# Altium PCB BloodPressure.PcbDoc
Units mil, origin at the board's own origin, x right, y up, seen from the top; angles counter-clockwise.
Board outline 3065 x 3285 mil, 2 copper layers (Top Layer, Bottom Layer); 38 components, 29 nets, 143 pads, 12 vias.
Unrouted connection lines stored in the file: 1.
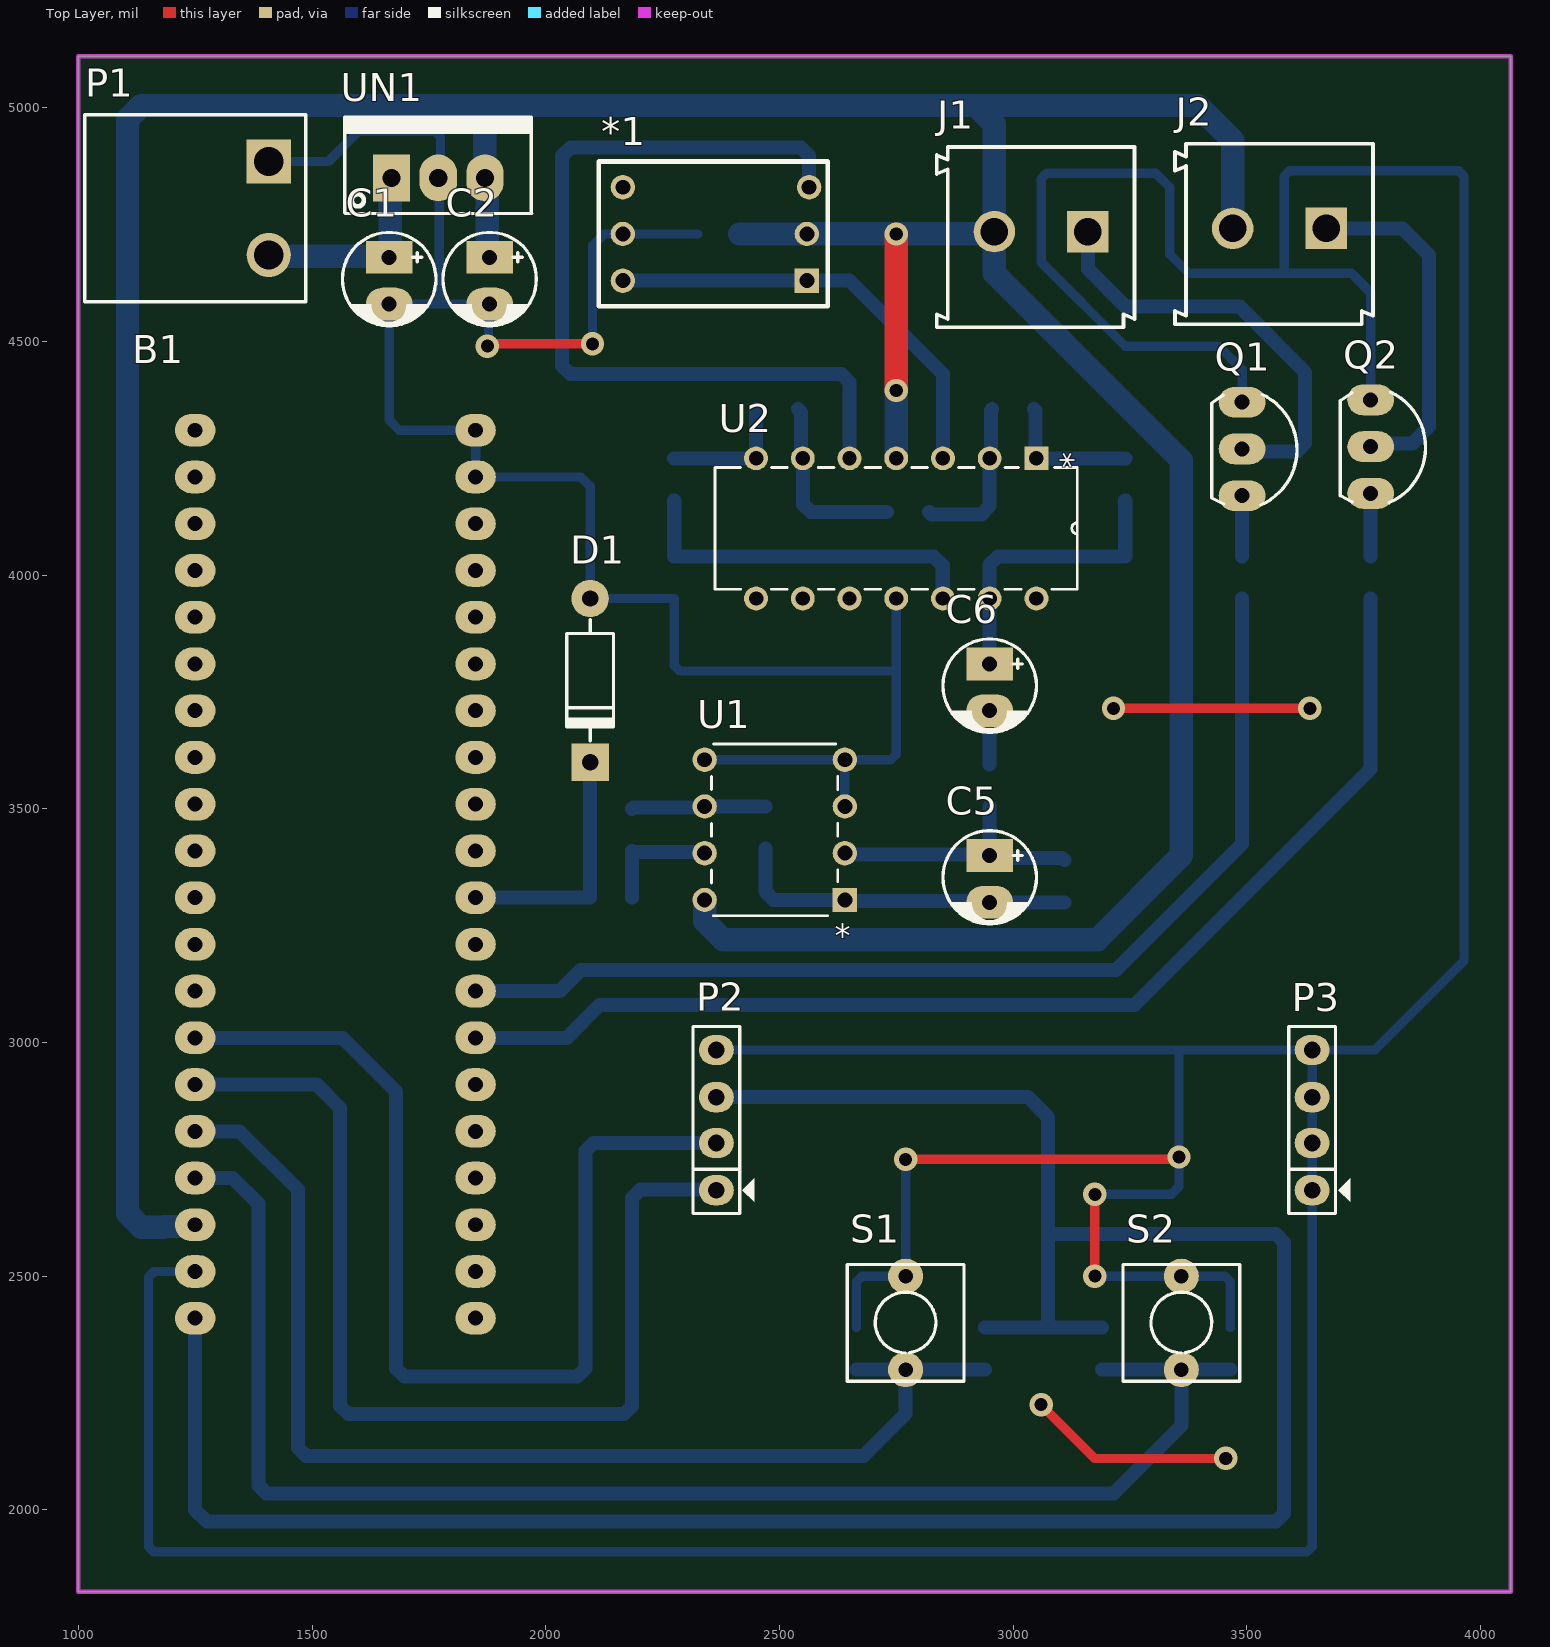
[diagram p0: Top Layer view]
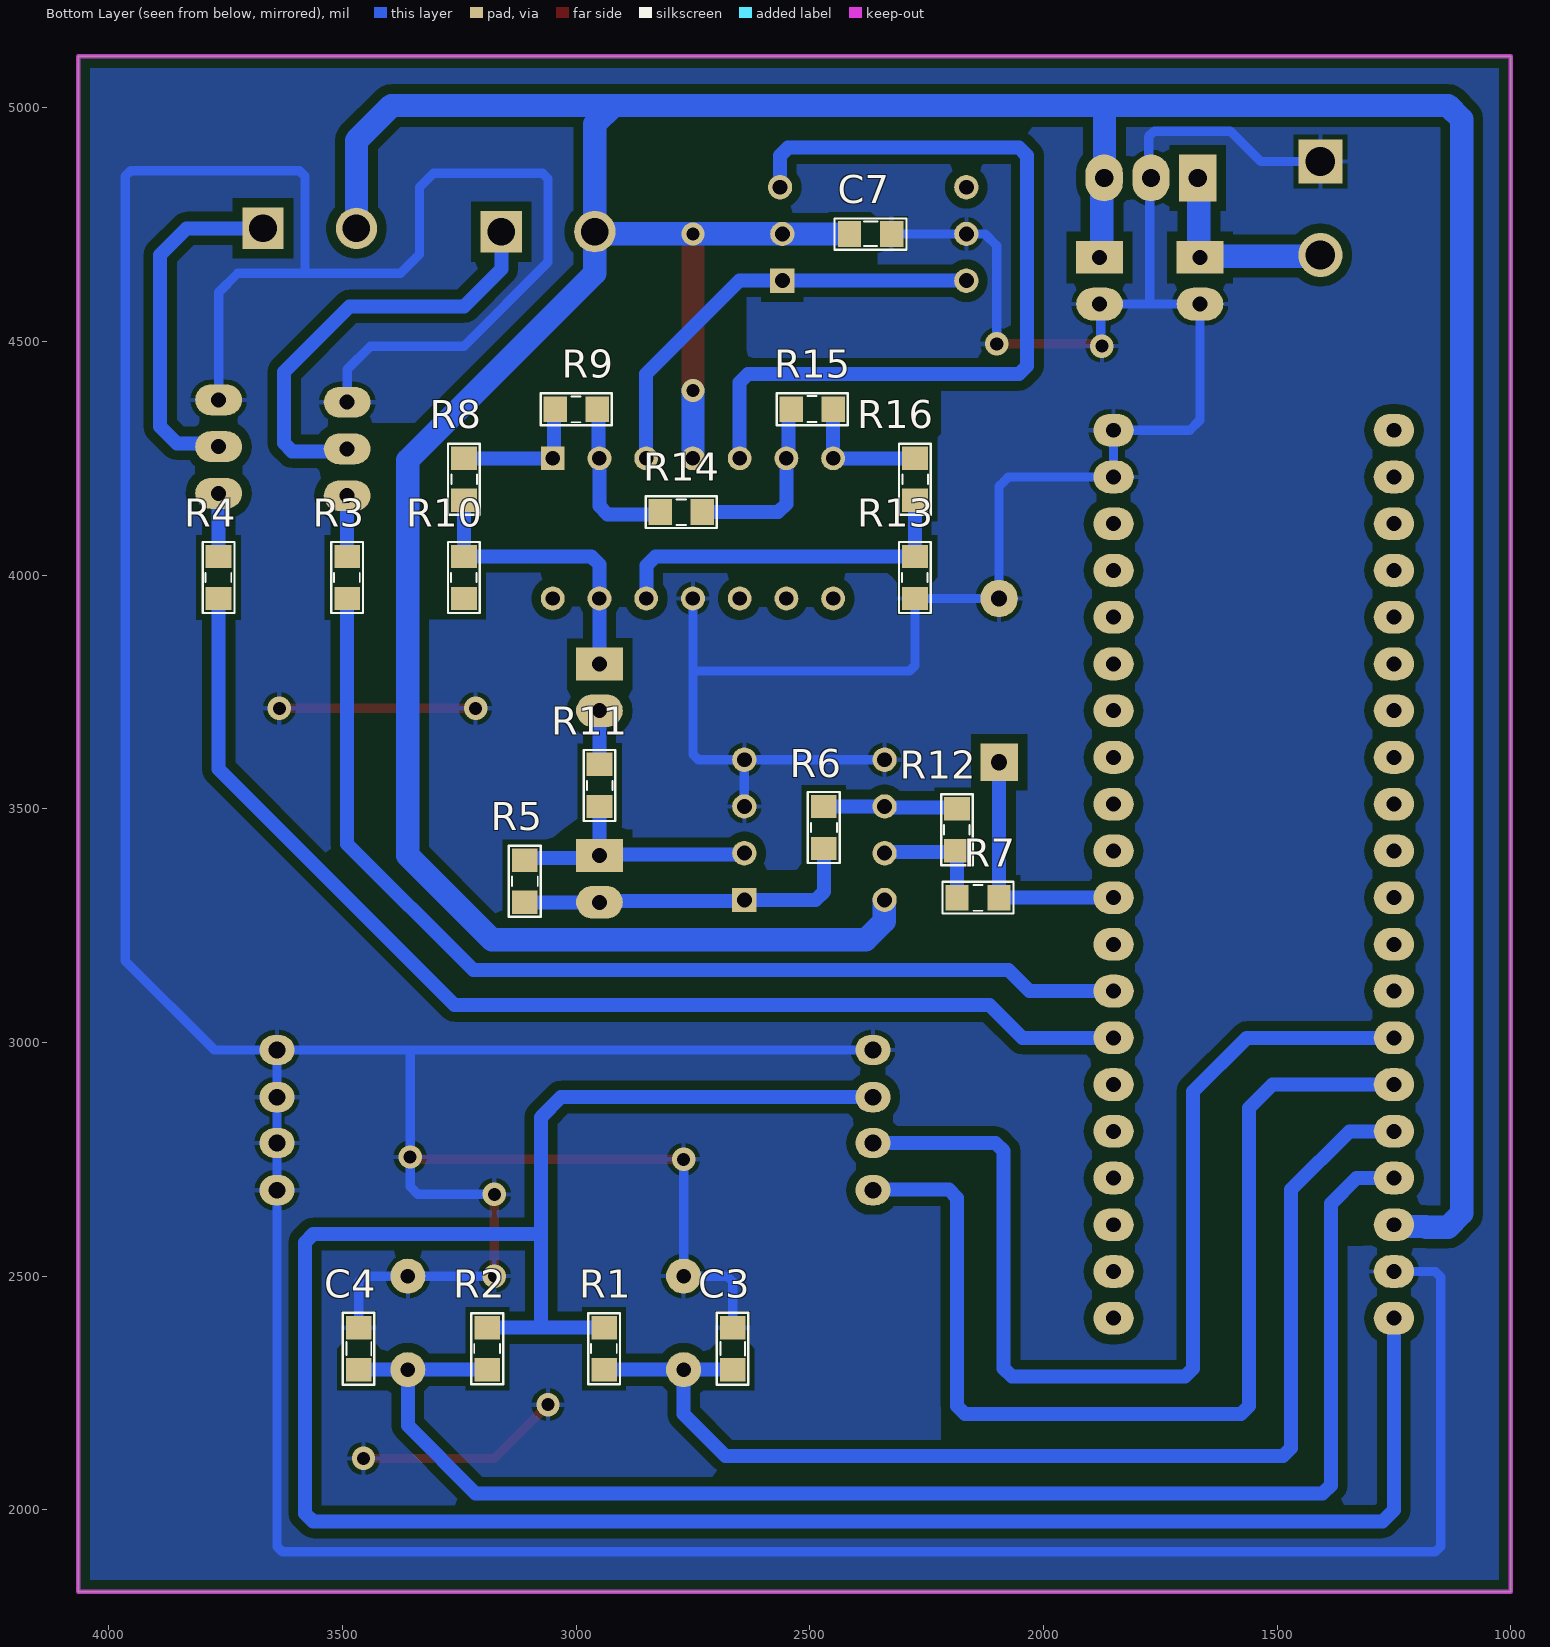
[diagram p1: Bottom Layer view, seen from below]
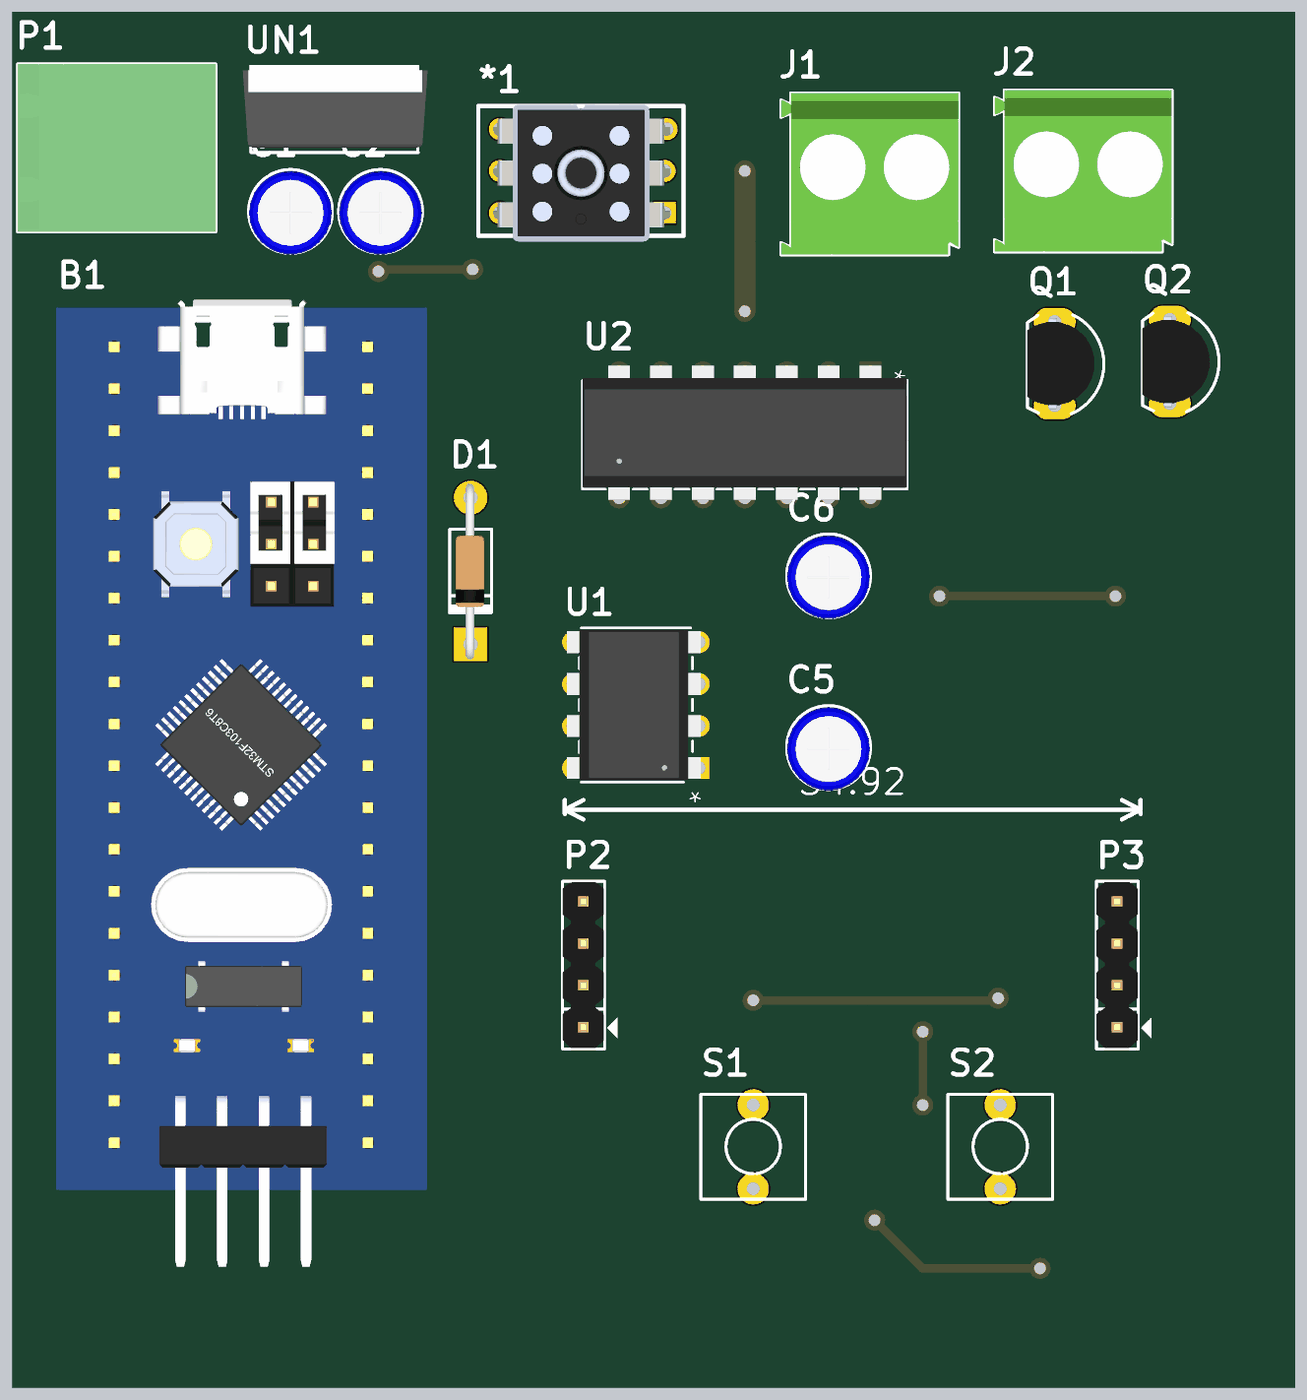
[diagram p2: 3D render of the assembled board from above, using the file's embedded part models]
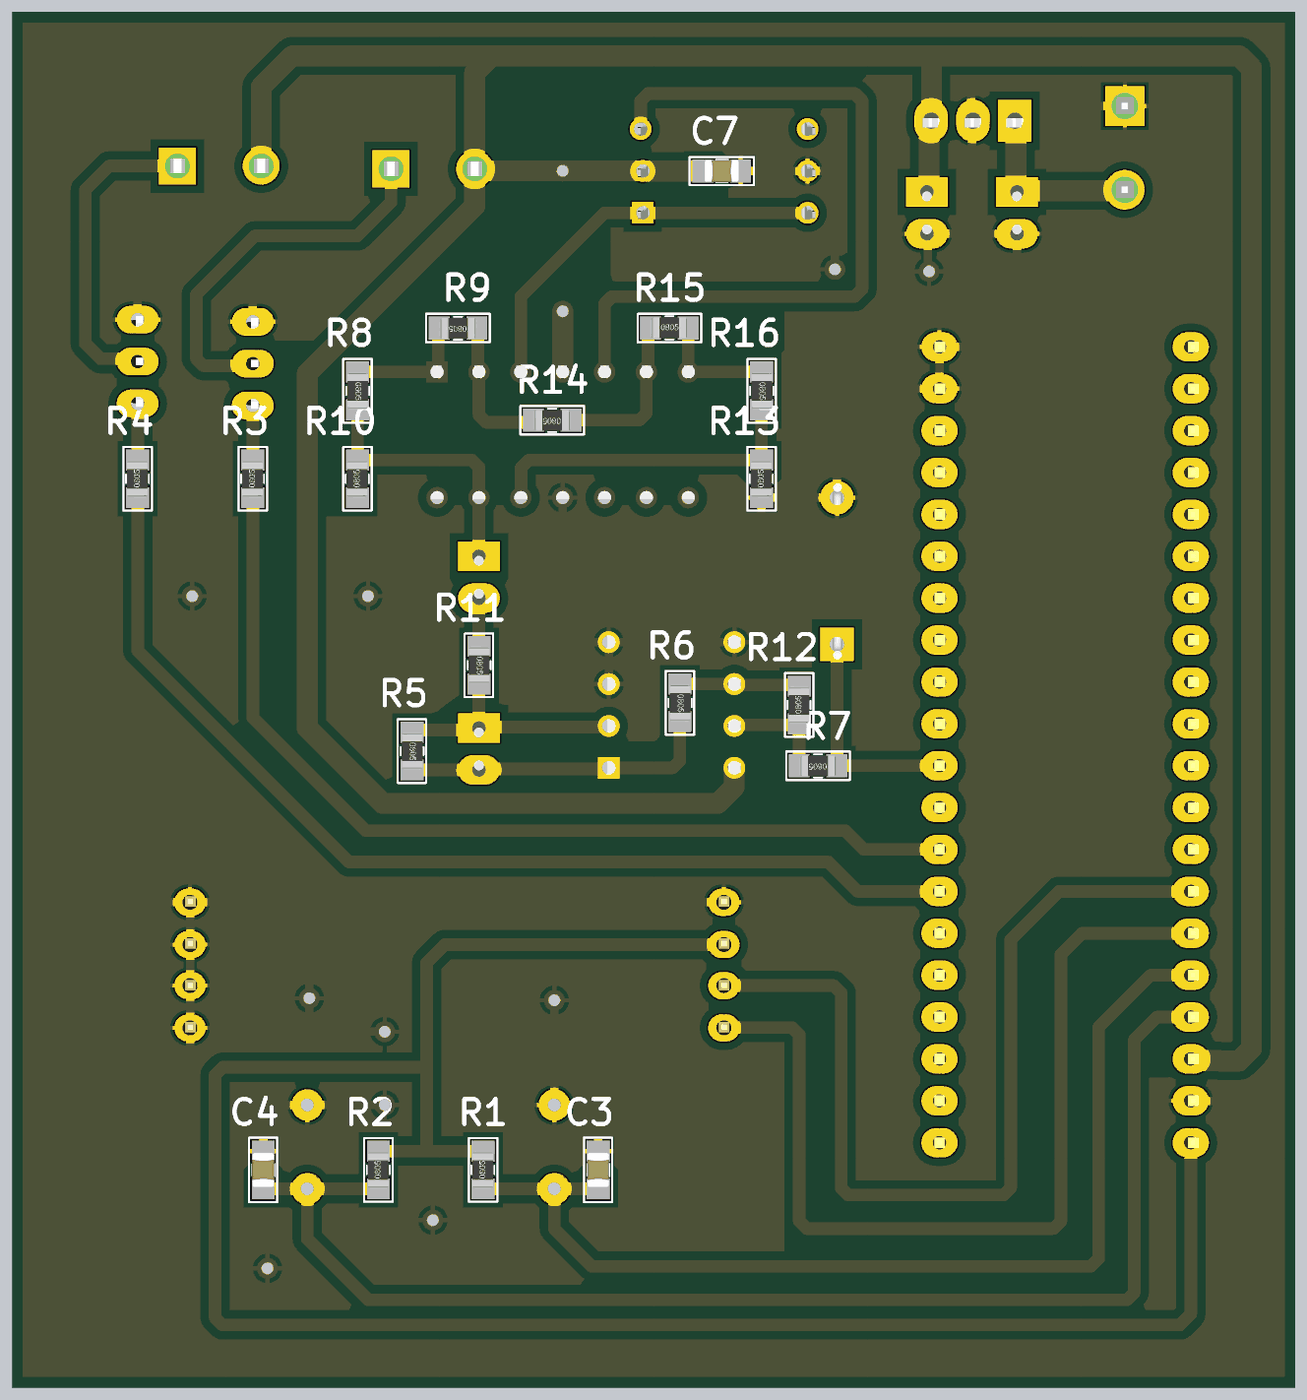
[diagram p3: 3D render of the assembled board from below, using the file's embedded part models]

## Layer stack, top to bottom
Top Solder: solder mask 0.4, Solder Resist, Dk 3.5
Top Layer: signal copper 1.4
Dielectric 1: dielectric 12.6, FR-4, Dk 4.8
Bottom Layer: signal copper 1.4
Bottom Solder: solder mask 0.4, Solder Resist, Dk 3.5

## Board outline
1000,1825 1000,5110 4065,5110 4065,1825

## Design rules (kind name [scope] priority, off if disabled: settings)
Clearance [All] p1: gap=20 ignorepadtopadclearanceinfootprint=FALSE
PolygonConnect [All] p1: connectstyle=Relief reliefconductorwidth=10 reliefentries=4 polygonreliefangle="90 Angle" airgapwidth=10
RoutingVias [All] p1: holewidth=28 width=50 viastyle="Through Hole" minholewidth=28 minwidth=50 maxholewidth=28 maxwidth=50
SolderMaskExpansion [All] p1: expansion=4 istentingtop=FALSE
Width [All] p1: maxlimit=50 minlimit=20 preferedwidth=30 minimp=50.000000 maximp=50.000000 favimp=50.000000
30 further rules are at their usual default settings.

## Components (designator, comment, footprint, x,y, rotation, side; value= is the part's Value field where it differs from the comment)
*1 "MPS20N0040D" MPS20N0040D 2558.7,4630 r180 top
B1 "BluePill" BlUEPILL 1850,4310 r180 top
C1 "Cap Pol" CP1/2 1665,4680 r270 top value=10uF
C2 "Cap Pol" CP1/2 1880,4680 r270 top value=10uF
C3 "Cap-100nF-50V-0805" CAP-SM-0805 2665,2390 r270 bottom value=100nF/50V
C4 "Cap-100nF-50V-0805" CAP-SM-0805 3465,2390 r270 bottom value=100nF/50V
C5 "Cap Pol" CP1/2 2950,3400 r270 top value=24nF
C6 "Cap Pol" CP1/2 2950,3810 r270 top value=47uF
C7 "Cap-100nF-50V-0805" CAP-SM-0805 2415,4730 r180 bottom value=10nF/50V
D1 "Diode" D1A 2095,3950 r90 top
J1 "691216510002S" 691216510002S 3060,4723.19 r180 top
J2 "691216510002S" 691216510002S 3570,4730 r180 top
P1 "691312510002" 691312510002 1250,4785 r270 top
P2 "Header 4" JP4 2365,2784 r90 top
P3 "Header 4" JP4 3640,2784 r90 top
Q1 "C1815" QTO-92 3490,4270 r270 top
Q2 "C1815" QTO-92 3765,4275 r270 top
R1 "Res-10k-0805" RES-SM-0805 2940,2300 r90 bottom value=10K
R2 "Res-10k-0805" RES-SM-0805 3190,2300 r90 bottom value=10K
R3 "Res-1K-0805" RES-SM-0805 3490,3950 r90 bottom value=1K
R4 "Res-1K-0805" RES-SM-0805 3765,3950 r90 bottom value=1K
R5 "Res-1K-0805" RES-SM-0805 3110,3390 r270 bottom value=333K
R6 "Res-1K-0805" RES-SM-0805 2470,3505 r270 bottom value=1K
R7 "Res-1K-0805" RES-SM-0805 2095,3310 r0 bottom value=10K
R8 "Res-1K-0805" RES-SM-0805 3240,4250 r270 bottom value=1K
R9 "Res-1K-0805" RES-SM-0805 2955,4355 r0 bottom value=1K
R10 "Res-1K-0805" RES-SM-0805 3240,3950 r90 bottom value=1K
R11 "Res-1K-0805" RES-SM-0805 2950,3595 r270 bottom value=10K
R12 "Res-1K-0805" RES-SM-0805 2185,3410 r90 bottom value=1K
R13 "Res-1K-0805" RES-SM-0805 2275,3950 r90 bottom value=1K
R14 "Res-1K-0805" RES-SM-0805 2730,4135 r0 bottom value=1K
R15 "Res-1K-0805" RES-SM-0805 2540,4355 r180 bottom value=1K
R16 "Res-1K-0805" RES-SM-0805 2275,4250 r270 bottom value=1K
S1 "Tact SW - 2Pin" SW2 2770,2500 r270 top
S2 "Tact SW - 2Pin" SW2 3360,2500 r270 top
U1 "NJM4558DD" DIP8_NMD 2640,3305 r180 top
U2 "LM324AN" N14 2450,3950 r270 top
UN1 "LM7805" QTO-220 1670,4850 r0 top

## Footprints (in the part's own frame and the unit in brackets; to place one, negate y for a bottom-side part, rotate by r counter-clockwise, add the part's x,y. Pads: shape width x height; smd on the part's side, far side on the other; paste and mask are expansions set on the pad)
691216510002S [mm] "Serie 2165S - 5.08 mm _ 2 pins"
  rect 2.25x2.25 hole 1.5: 1(-2.54,-0.3)
  round 2.25 hole 1.5: 2(2.54,-0.3)
  silkscreen extent -5.08,-4.9 5.68,4.9, body extent -5.08,-4.9 5.68,4.9, height 13.85
691312510002 [mm] "5,08mm - PCB Headers - Horizontal - Opened ends - 02p"
  rect 2.4x2.4 hole 1.6: 1(-2.54,4)
  round 2.4 hole 1.6: 2(2.54,4)
  silkscreen extent -5.08,-6 5.08,6, body extent -5.08,-6 5.08,6, height 8.55
BlUEPILL [mil]
  oval 86.61x70 hole 32: 1(0,1900) 2(0,1800) 3(0,1700) 4(0,1600) 5(0,1500) 6(0,1400) 7(0,1300) 8(0,1200) 9(0,1100) 10(0,1000) 11(0,900) 12(0,800) 13(0,700) 14(0,600) 15(0,500) 16(0,400) 17(0,300) 18(0,200) 19(0,100) 20(0,0) 21(600,0) 22(600,100) 23(600,200) 24(600,300) 25(600,400) 26(600,500) 27(600,600) 28(600,700) 29(600,800) 30(600,900) 31(600,1000) 32(600,1100) 33(600,1200) 34(600,1300) 35(600,1400) 36(600,1500) 37(600,1600) 38(600,1700) 39(600,1800) 40(600,1900)
  body extent -141,-113 745,2196, height 571
CAP-SM-0805 [mil]
  rect 50x55 smd: 1(0,0) 2(90,0)
  silkscreen extent -32,-34 122,33, body extent 4,-27 86,27, height 30
CP1/2 [mil] "Tu hoa < 22uF/16>50V"
  rect 70x100 hole 32: 1(0,0)
  oval 70x100 hole 32: 2(100,0)
  silkscreen extent -53,-100 146,100, body extent -49,-99 149,99, height 287
D1A [mil] "Diode 1N4007, W 100mil, L 350mil"
  round 80 hole 35: 1(0,0)
  rect 80x80 hole 35: 2(-350,0)
  silkscreen extent -305,-50 -45,50, body extent -386,-33 34,36, height 84
DIP8_NMD [mil]
  rect 52x52 / inner round 60 / far side rect 52x52 hole 32 paste-26 mask+0: 1(0,0)
  round 52 / inner round 60 / far side round 52 hole 32 paste-26 mask+0: 2(0,-100) 3(0,-200) 4(0,-300) 5(300,-300) 6(300,-200) 7(300,-100) 8(300,0)
  silkscreen extent 15,-334 285,34, body extent -5,-329 315,29, height 172
JP4 [mil] "Jumper 4"
  oval 65x75 hole 36: 1(-100,0) 2(1,0) 3(99,0) 4(200,0)
  silkscreen extent -150,-81 250,50, body extent -148,-48 248,50, height 323
MPS20N0040D [mil]
  rect 52x52 hole 32: 1(0,0)
  round 52 hole 32: 2(0,-100) 3(-5,-200) 4(393.7,-200) 5(393.7,-100) 6(393.7,0)
  silkscreen extent -45,-255 445,55, body extent -13,-258 413,68, height 352
N14 [mil]
  rect 51x51 / inner round 60 / far side rect 51x51 hole 31 paste-25.5 mask-25.5: 1(-300,600)
  round 51 / inner round 60 / far side round 51 hole 31 paste-25.5 mask-25.5: 2(-300,500) 3(-300,400) 4(-300,300) 5(-300,200) 6(-300,100) 7(-300,0) 8(0,0) 9(0,100) 10(0,200) 11(0,300) 12(0,400) 13(0,500) 14(0,600)
  silkscreen extent -280,-88 -20,688, body extent -315,-87 5,687, height 205
QTO-92 [mil] "TO-92"
  oval 66x100 hole 32: 1(-100,0) 2(0,0) 3(100,0)
  silkscreen extent -117,-65 120,118, body extent -109,-66 109,95, height 245
QTO-220 [mil] "TO-220 - 1-2-3"
  rect 80x100 hole 39: 1(0,0)
  oval 80x100 hole 39: 2(100,0) 3(200,0)
  silkscreen extent -100,-76 300,130, body extent -119,-64 322,121, height 755
RES-SM-0805 [mil]
  rect 50x55 smd: 1(0,0) 2(90,0)
  silkscreen extent -31,-34 121,34, body extent -5,-24 95,25, height 20
SW2 [mil] "SW button 2pin, 250x 250 mil"
  round 75 hole 31: 1(0,0) 2(200,0)
  silkscreen extent -25,-125 225,125

## Part data
C1 C2 C5 C6: library part Cap-TH-Pol, "Polarized Capacitor (Radial)"
C3 C4 C7: "CAP CER 0.1UF 50V Y5V 0805", Manufacturer="Samsung Electro-Mechanics", Manufacturer Part Number=CL21F104ZBCNNNC, Supplier 1 Part Number=1276-1007-1-ND, Local Supplier=thegioiic, Local Supplier Link=https://www.thegioiic.com/products/tu-gom-0805-100nf-0-1uf-50v, Supplier 1=Digikey, Supplier 1 Link=https://www.digikey.com/product-detail/en/samsung-electro-mechanics/CL21F104ZBCNNNC/1276-1007-1-ND/3889093
D1: "Default Diode"
J1 J2: "WR-TBL Serie 2165S Horizontal Entry Modular, Rising Cage Clamp, pitch 5.08mm, 2p", Operating Temperature="-30 to +120degC", Rated Current [UL]=14A, Working Voltage [UL]=300VAC, Application="Rising Cage Clamp", Compliance="ROHS & Reach", ComponentLink1Description=Manufacturer, ComponentLink1URL=http://www.we-online.de, ComponentLink2Description=Datasheet, ComponentLink2URL=https://katalog.we-online.de/em/datasheet/691216510002S.pdf, Modularity=Yes, Mounting Technology=THT, Packaging=Box, Part Number=691216510002S, PCB/Cable/Panel=PCB, Pin Number=2, Pitch=5.08mm, Published Date="October 2019", Publisher="Wurth Elektronik", Type=Horizontal
P1: "WR-TBL Serie 312 Open Horizontal PCB Header, Pluggable, pitch 5.08mm, 2p", Operating Temperature="-40 to +105degC", Rated Current [UL]=20A, Working Voltage [UL]=300VAC, Application=Pluggable, Compliance=RoHS, ComponentLink1Description=Manufacturer, ComponentLink1URL=http://www.we-online.de, ComponentLink2Description=Datasheet, ComponentLink2URL=https://katalog.we-online.de/em/datasheet/691312510002.pdf, Modularity=No, Mounting Technology=THT, Packaging=Box, Part Number=691312510002, PCB/Cable/Panel=PCB, Pin Number=2, Pitch=5.08mm, Published Date="October 2019", Publisher="Wurth Elektronik", Type=Horizontal
P2 P3: "Header, 4-Pin", Local Supplier Part Number=x, LatestRevisionDate=17-Jul-2002, LatestRevisionNote="Re-released for DXP Platform.", Local Supplier=thegioiic, Local Supplier Link=https://www.thegioiic.com/products/hang-rao-duc-don-2-54mm-40-chan-1-hang-cao-11-4mm-xuyen-lo, Publisher="Altium Limited"
Q1 Q2: "NPN Bipolar Transistor"
R1 R2: "RES 10K OHM 1% 1/4W 0805", Manufacturer="Stackpole Electronics Inc", Manufacturer Part Number=RNCP0805FTD10K0, Supplier 1 Part Number=RNCP0805FTD10K0CT-ND, Local Supplier=thegioiic, Local Supplier Link=https://www.thegioiic.com/products/dien-tro-10-kohm-0805-5, Supplier 1=Digikey, Supplier 1 Link=https://www.digikey.com/product-detail/en/stackpole-electronics-inc/RNCP0805FTD10K0/RNCP0805FTD10K0CT-ND/2240601
R3 R4 R5 R6 R7 R8 R9 R10 R11 R12 R13 R14 R15 R16: "RES 1K OHM 1% 1/4W 0805", Manufacturer="Stackpole Electronics Inc", Manufacturer Part Number=RNCP0805FTD1K00, Supplier 1 Part Number=RNCP0805FTD1K00CT-ND, Local Supplier=thegioiic, Local Supplier Link=https://www.thegioiic.com/products/dien-tro-1-kohm-0805-5, Supplier 1=Digikey, Supplier 1 Link=https://www.digikey.com/product-detail/en/stackpole-electronics-inc/RNCP0805FTD1K00/RNCP0805FTD1K00CT-ND/2240568
S1 S2: "Switch button 2 pin"
U1: "No Description Available", Mfr_Name="Nisshinbo Micro Devices", RefDes=RefDes, Type=Type
U2: "No Description Available", Mfr_Name="Texas Instruments", RefDes=RefDes, Type=Type
UN1: "Positive Voltage Regulator"

## Via types
v1: diameter 50, hole 28, Top Layer to Bottom Layer, tented both sides, 12 vias

## Nets (pads, with @x,y where several pads share a name; then routed paths per layer and width w, separated by ;. In a path a pad name is that pad's centre, name@x,y a point inside that pad or via, vN(x,y) a via of type N, cw(c..) or ccw(c..) an arc to the next point about the centre after c; other vN are vias at no path point)
3V3: B1.40 P2.3 R1.2 R2.2 | length 5279.6
  Bottom Layer w30: B1.40 1250,2000 1275,1975 3562.43,1975 3580,1992.57 3580,2572.43 3562.43,2590 3080,2590 ; P2.3 3032,2883 3075,2840 3075,2590 ; R1.2 3075,2390 ; 3080,2595 3075,2590 ; R2.2 3075,2390 ; 3075,2390 3075,2590
+5: *1.2 B1.38 C2.1 C7.1 J1.2 J2.2 U1.8 U2.4 UN1.3 | length 9396.9
  Top Layer w50: v1(2750,4395) v1(2750,4730)
  Bottom Layer w50: B1.38 1246.17,2606.17 1182.45,2606.17 1181.28,2605 1134.29,2605 1105,2634.29 1105,4975.71 1134.29,5005 1869.29,5005 ; C2.1 1875,4685 1875,4845 1869.29,4850.71 1869.29,5005 ; U1.8 2340.38,3304.62 2340.38,3259.62 2380,3220 3180,3220 3360,3400 3360,4246.14 2960,4646.14 J1.2 ; C7.1 *1.2 2559.08,4730.38 2750,4730.38 2955.38,4730.38 J1.2 ; U2.4 v1(2750,4395) ; J2.2 3470,4930 3395,5005 2920,5005 ; 1869.29,5005 2920,5005 ; 2920,5005 2960,4965 J1.2
+Vo: *1.3 U2.5 | length 1852.5
  Bottom Layer w30: *1.3 2563.7,4897.43 2546.13,4915 2052.57,4915 2035,4897.43 2035,4447.57 2052.57,4430 2632.43,4430 2650,4412.43 U2.5
-Vo: *1.1 *1.6 U2.3 | length 947.8
  Bottom Layer w30: *1.6 *1.1 2650,4630 2850,4430 U2.3
GND: *1.5 B1.19 B1.20 B1.39 C1.2 C2.2 C3.1 C4.1 C7.2 D1.1 P1.1 P2.4 P3.1 P3.2 P3.3 P3.4 Q1.1 Q2.1 R13.1 S1.1 S2.1 U1.3 U1.4 U1.5 U2.11 UN1.2 | length 17495.2
  Top Layer w20: v1(1875,4490) 1880,4495 v1(2100,4495) ; v1(2770,2750) 3350,2750 v1(3355,2755) ; v1(3060,2225) 3175,2110 v1(3455,2110) ; v1(3175,2500) v1(3175,2675) ; v1(3215,3715) v1(3635,3715)
  Bottom Layer w20: B1.39 1161.72,2510 1150,2498.28 1150,1921.72 1161.72,1910 3628.28,1910 3640,1921.72 P3.2 P3.3 P3.4 ; P1.1 1535,4885 1600,4950 1763.28,4950 1775,4938.28 1775,4855 UN1.2 1772.5,4847.5 1772.5,4580 ; v1(1875,4490) 1877.5,4492.5 1877.5,4577.5 C2.2 1772.5,4580 ; v1(2100,4495) 2100,4705 2125,4730 C7.2 ; U1.5 U1.4 ; P2.4 3355,2984 ; U1.3 U1.4 ; C3.1 2665,2488.28 2676.72,2500 S1.1 v1(2770,2750) ; U2.11 2750,3800 ; v1(3175,2500) S2.1 3453.28,2500 3465,2488.28 C4.1 ; v1(3175,2675) 3338.28,2675 3355,2691.72 v1(3355,2755) 3355,2984 ; v1@3450,2110 v1(3455,2110) ; Q1.1 3490,4440 3440,4490 3240,4490 3060,4670 3060,4848.28 3071.72,4860 3305,4860 3335,4830 3335,4686.72 3375.86,4645.86 3580,4645.86 ; Q2.1 3765,4605 3724.14,4645.86 3580,4645.86 ; 1772.5,4580 C1.2 1665,4331.72 1686.72,4310 B1.20 B1.19 2075,4210 2084.97,4200.03 2095,4190 D1.1 R13.1 2275,3806.72 2286.72,3795 2745,3795 2750,3800 ; U1.4 2738.28,3605 2750,3616.72 2750,3800 ; 3355,2984 P3.4 ; 3580,4645.86 3580,4853.28 3591.72,4865 3953.28,4865 3965,4853.28 3965,3175 3774,2984 P3.4
MOTOR: B1.8 R3.1 | length 2295.5
  Bottom Layer w30: B1.8 2030,3110 2075,3155 3220,3155 3490,3425 R3.1
NetC1_1: C1.1 P1.2 UN1.1 | length 431.7
  Bottom Layer w50: P1.2 1409.98,4682.5 1662.5,4682.5 C1.1 1667.5,4682.5 1667.5,4847.5 UN1.1
NetC5_1: C5.1 R5.1 R11.2 U1.2 | length 581.2
  Bottom Layer w30: U1.2 2642.5,3402.5 2947.5,3402.5 C5.1 ; R11.2 C5.1 ; R5.1 3105,3395 2955,3395 C5.1
NetC5_2: C5.2 R5.2 R6.2 U1.1 | length 741.8
  Bottom Layer w30: R6.2 2470,3322.57 2487.57,3305 U1.1 2642.5,3302.5 2947.5,3302.5 C5.2 R5.2
NetC6_1: C6.1 R8.2 R10.2 U2.13 | length 629.7
  Bottom Layer w30: C6.1 U2.13 2950,4022.43 2967.57,4040 R10.2 R8.2
NetC6_2: C6.2 R11.1 | length 115
  Bottom Layer w30: R11.1 C6.2
NetJ1_1: J1.1 Q1.2 | length 932.9
  Bottom Layer w30: J1.1 3160,4655 3240,4575 3485,4575 3625,4435 3625,4282.57 3607.43,4265 3495,4265 Q1.2
NetJ2_1: J2.1 Q2.2 | length 753.6
  Bottom Layer w30: J2.1 3833.19,4741.81 3890,4685 3890,4317.57 3854.31,4281.89 3771.89,4281.89 Q2.2
NetQ1_3: Q1.3 R3.2 | length 130
  Bottom Layer w30: R3.2 Q1.3
NetQ2_3: Q2.3 R4.2 | length 135
  Bottom Layer w30: R4.2 Q2.3
NetR6_1: R6.1 R12.2 U1.6 | length 287.1
  Bottom Layer w30: R12.2 2187.5,3502.5 2337.5,3502.5 U1.6 R6.1
NetR7_2: R7.2 R12.1 U1.7 | length 257.1
  Bottom Layer w30: R7.2 R12.1 2187.5,3407.5 2337.5,3407.5 U1.7
NetR8_1: R8.1 R9.2 U2.1 | length 297.1
  Bottom Layer w30: R9.2 3047.5,4352.5 3047.5,4252.5 U2.1 R8.1
NetR9_1: R9.1 R14.2 U2.2 | length 348.8
  Bottom Layer w30: R14.2 2825,4130 2932.43,4130 2950,4147.57 U2.2 2952.5,4252.5 2952.5,4352.5 R9.1
NetR10_1: R10.1 U2.14
NetR13_2: R13.2 R16.2 U2.12 | length 773.3
  Bottom Layer w30: R16.2 R13.2 2830,4040 2849.5,4020.5 2849.5,3950.5 U2.12
NetR14_1: R14.1 R15.1 U2.6 | length 393.8
  Bottom Layer w30: R15.1 2545.98,4349.02 2545.98,4254.02 U2.6 2550,4152.57 2567.57,4135 R14.1
NetR15_2: R15.2 R16.1 U2.7 | length 280
  Bottom Layer w30: R16.1 U2.7 R15.2
SCL: B1.34 P2.2 | length 2241.8
  Bottom Layer w30: B1.34 1565,3010 1680,2895 1680,2302.57 1697.57,2285 2067.43,2285 2085,2302.57 2085,2767.43 2102.57,2785 P2.2
SDA: B1.35 P2.1 | length 2240.2
  Bottom Layer w30: B1.35 1510,2910 1560,2860 1560,2222.57 1577.57,2205 2167.43,2205 2185,2222.57 2185,2667.43 2202.57,2685 2364,2685 P2.1
START: B1.36 C3.2 R1.1 S1.2 | length 2538.8
  Bottom Layer w30: B1.36 1345,2810 1470,2685 1470,2132.57 1487.57,2115 2680,2115 2770,2205 S1.2 ; C3.2 S1.2 ; R1.1 S1.2
STOP: B1.37 C4.2 R2.1 S2.2 | length 3197.5
  Bottom Layer w30: B1.37 1330,2710 1385,2655 1385,2052.57 1402.57,2035 3215,2035 3360,2180 S2.2 ; R2.1 S2.2 ; C4.2 S2.2
Vadc: B1.10 D1.2 R7.1 | length 535
  Bottom Layer w30: B1.10 R7.1 D1.2
VALVE: B1.7 R4.1 | length 2518.2
  Bottom Layer w30: B1.7 2045,3010 2115,3080 3260,3080 3765,3585 R4.1
pads on no net: *1.4 B1.1 B1.2 B1.3 B1.4 B1.5 B1.6 B1.9 B1.11 B1.12 B1.13 B1.14 B1.15 B1.16 B1.17 B1.18 B1.21 B1.22 B1.23 B1.24 B1.25 B1.26 B1.27 B1.28 B1.29 B1.30 B1.31 B1.32 B1.33 U2.8 U2.9 U2.10

## Polygon pours and split planes (outlines as drawn)
GND on Bottom Layer "bot" (solid, remove dead copper, pour order 0): 1000,5110 4065,5110 4065,1825 1000,1825

## Keep-outs
Keep-Out Layer:
  the board outline again, w10

## Other copper
Bottom Layer:
  pour cut-out: 2517.5,3370 2519.31,3368.19 2611.76,3368.19 2611.76,3351.22 2611.53,3351
  pour cut-out: 2227.5,4295 2220,4302.5 2220,4410 2295,4410 2305,4400
  pour cut-out: 2359.14,4692.5 2355,4688.36 2355,4655 2375,4655 2400,4680
  pour cut-out: 2641.56,4464.1 2635.38,4470.28 2635.38,4594.7 2670.3,4594.7 2705,4560
  pour cut-out: 2995,3480 3030,3455 3055,3435 3040,3420
  pour cut-out: 3260,3905 3325,3905 3325,3945 3330,3950
  pour cut-out: 1297.53,2570.77 1303.31,2565 1360,2565 1360,2615
  pour cut-out: 3448.68,4317.29 3440.98,4325 3345,4325 3345,4315 3380,4280
  pour cut-out: 2220.3,2222.57 2220,2222.27 2220,2145 2155,2145

## Dimensions
2320,3195 to 3695,3200 on Top Overlay

## Text inside footprints (layer, text, board x,y; h text height)
U1: Top Overlay "*" at 2652.5,3274 h50 r180; Mechanical 13 "*" at 2622.5,3330 h50 r180
U2: Top Overlay "*" at 3080.5,4262.5 h50 r270; Mechanical 13 "*" at 3080.5,4262.5 h50 r270